# EAGLE board PoppingElement-foam (EAGLE 6.5.0)
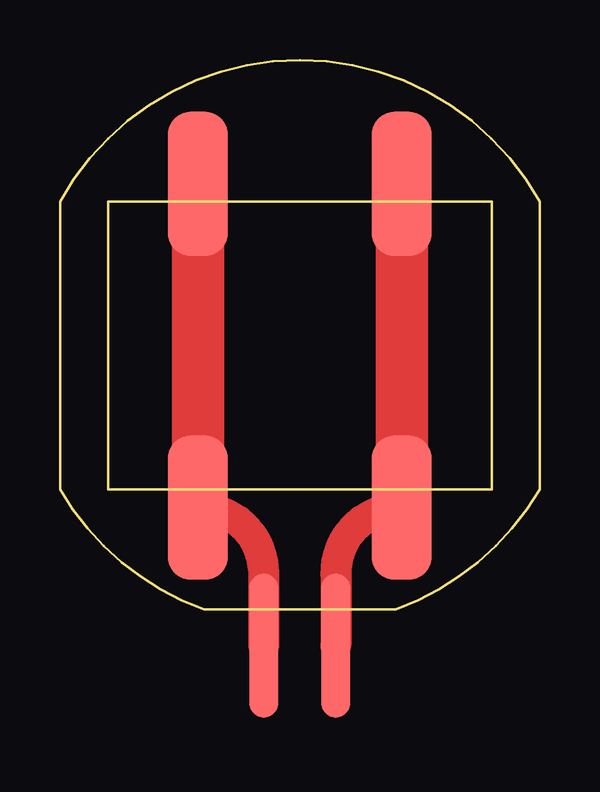
[diagram p0: board, top side]
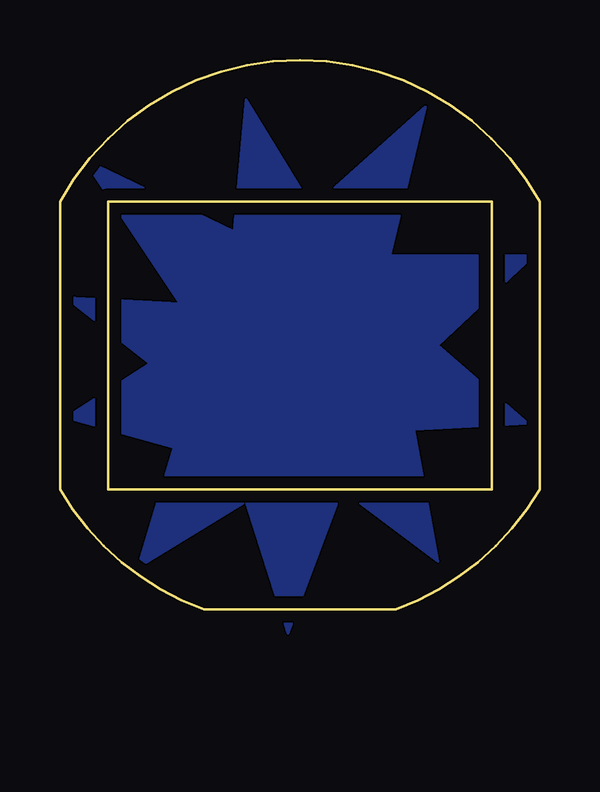
[diagram p1: board, bottom side, seen from below]

Size 20 x 22.91 mm. Coordinates in mm from the lower left corner, seen from the top.
Outline: 6,0 14,0 arc40 20,5 20,17 arc122 0,17 0,5 arc40 6,0
Outline: 2,17 18,17 18,5 2,5 2,17
Copper layers (1*16): Top 0.035mm / dielectric 1.5mm / Bottom 0.035mm
Design rules "default *": minimum track width 10mil, minimum drill 24mil, track to track 8mil, track to pad 8mil, pad to pad 8mil, via to via 8mil, smd to smd 8mil, copper to edge 0.5mm, drill to drill 8mil, minimum pad ring 10mil, minimum via ring 8mil, stop-mask expansion 4mil, vias tented up to drill 0mil, thermal gap 10mil

## Footprints (pad centres in the part's own frame; a part is rotated, then mirrored left to right if it is on the bottom)
CIGARETTE_LIGHTER = smd 2.5 x 6: P$1 -4.25,6.75; P$2 4.25,6.75; P$3 -4.25,-6.75; P$4 4.25,-6.75
PADS_2MMX2 = smd 1.2 x 6: P$1 1.5,0; P$2 -1.5,0

## Placement (x,y rotation side)
U$1  CIGARETTE_LIGHTER  [CIGARETTE_LIGHTER]  10,11 0 top
U$2  M02  [PADS_2MMX2]  10,-1.5 0 top

## Library data of the parts
U$1 U$2 = blinkinlabs

## Nets
N$1: U$1.P$1 U$1.P$3 U$2.P$2
N$2: U$1.P$2 U$1.P$4 U$2.P$1

## Tracks (layer width: path | path; a pad name or v marks a point on that pad's centre or on a via)
N$1
  Top 1.3: U$2.P$2 8.5,1.5 arc90 U$1.P$3
  Top 2.184: U$1.P$1 U$1.P$3
N$2
  Top 1.3: U$1.P$4 arc90 11.5,1.5 U$2.P$1
  Top 2.184: U$1.P$2 U$1.P$4
N$4
  pour Bottom: 12.25,4.5 10.5,-1 8.25,5 4.25,2 5.25,7.5 0.5,7.75 4.25,11 0.25,14.75 6.25,14.75 4.75,21 9.5,16.75 12.25,21.25 12.75,15.75 19,18.75 15,12.75 19.75,13 16.25,10.25 19.75,8 15.25,6.75 16.75,1.75